# EAGLE board untitled (EAGLE 8.3.1)
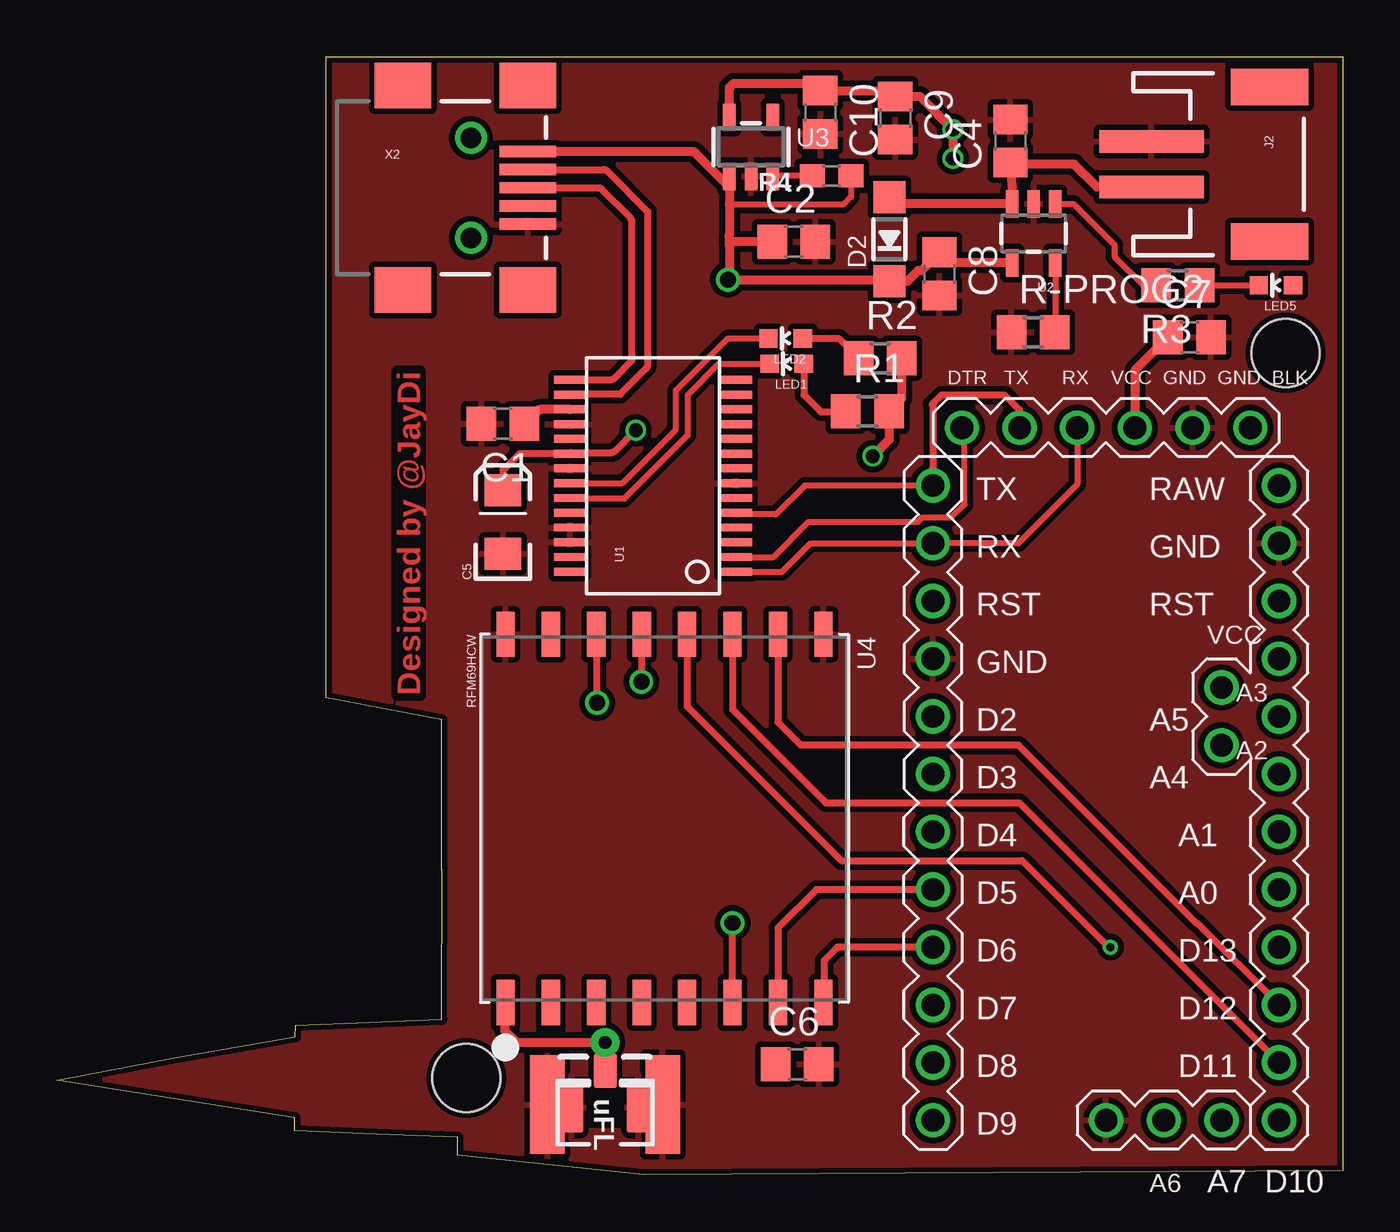
[diagram p0: board, top side]
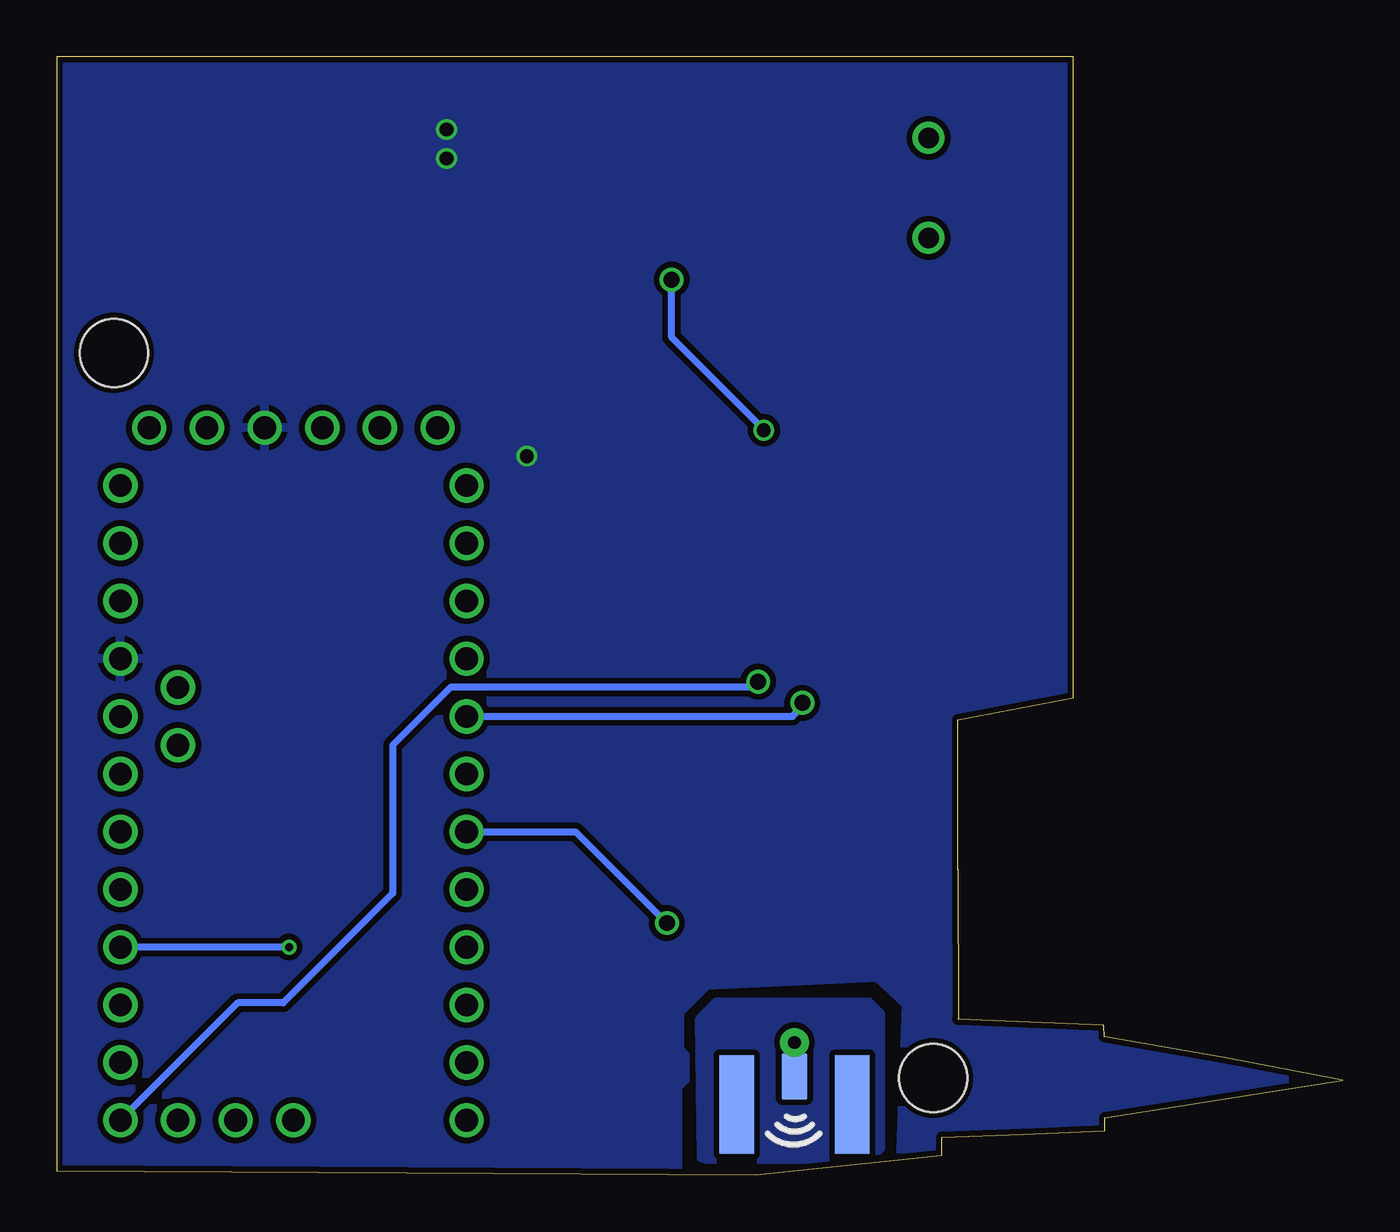
[diagram p1: board, bottom side, seen from below]

Size 56.62 x 49.21 mm. Coordinates in mm from the lower left corner, seen from the top.
Outline: 16.93,13.44 16.93,20.04 11.85,20.99 11.85,49.21 56.62,49.21 56.62,0.18 41.24,0.09 25.86,0 17.64,0.86 17.64,1.66 14.06,1.8 10.48,1.94 10.48,2.5 0,4.16 5.29,5.17 10.5,6.09 10.52,6.55 10.53,6.6 13.78,6.72 16.93,6.84
Outline: 16.93,13.45 16.93,6.84
Copper layers (1*16): Top 0.035mm / dielectric 1.5mm / Bottom 0.035mm
Design rules "dirt_cheap_dirty_boards.v1": minimum track width 5mil, minimum drill 12mil, track to track 5mil, track to pad 5mil, pad to pad 5mil, via to via 5mil, smd to smd 0mil, copper to edge 10mil, drill to drill 10mil, minimum pad ring 10mil, minimum via ring 6mil, stop-mask expansion 2mil, vias tented up to drill 25mil, thermal gap 10mil
Net classes: 0 default: width 0.254 mm, drill 0.6 mm, clearance 0.254 mm; 1 power: width 0.406 mm, drill 0.6 mm, clearance 0.205 mm to class 0, clearance 0.254 mm
Holes 3 mm at 18.03,4.27 54.1,36.18

## Footprints (pad centres in the part's own frame; a part is rotated, then mirrored left to right if it is on the bottom)
C0805 = smd 1.3 x 1.5: 1 -0.95,0; 2 0.95,0
EIA3216 = smd 1.4 x 1.6: A 1.4,0; C -1.4,0
SOD-123 = smd 1.4 x 1.4: A 1.85,0; C -1.85,0
JST-2-SMD = smd 1 x 4.6: 1 -1,-3.7; 2 1,-3.7 | smd 1.6 x 3.4: NC1 -3.4,1.5; NC2 3.4,1.5
SMA_UFL_PAD_TINY = smd 1.524 x 1.016: ANT1 -3.843,0 | drill 0.559 pad 1.27: ANT2 -5.08,0 | smd 2.032 x 1.143 bottom: ANT3 -3.589,0 | smd 2.2 x 1.016: GND1 -2.223,1.47; GND2 -2.223,-1.47 | smd 4.318 x 1.524: GND3 -2.349,-2.54; GND4 -2.349,2.54 | smd 4.318 x 1.524 bottom: GND5 -2.349,2.54; GND6 -2.349,-2.54
LED-0603 = smd 0.8 x 0.8: A 0,-0.75; C 0,0.75
R0805 = smd 1.3 x 1.5: 1 -0.95,0; 2 0.95,0
0603-NO = smd 1.1 x 1: 1 -0.85,0; 2 0.85,0
SSOP28DB = smd 0.348 x 1.397: 1 -4.225,-3.656; 2 -3.575,-3.656; 3 -2.925,-3.656; 4 -2.275,-3.656; 5 -1.625,-3.656; 6 -0.975,-3.656; 7 -0.325,-3.656; 8 0.325,-3.656; 9 0.975,-3.656; 10 1.625,-3.656; 11 2.275,-3.656; 12 2.925,-3.656; 13 3.575,-3.656; 14 4.225,-3.656; 15 4.225,3.656; 16 3.575,3.656; 17 2.925,3.656; 18 2.275,3.656; 19 1.625,3.656; 20 0.975,3.656; 21 0.325,3.656; 22 -0.325,3.656; 23 -0.975,3.656; 24 -1.625,3.656; 25 -2.275,3.656; 26 -2.925,3.656; 27 -3.575,3.656; 28 -4.225,3.656
SOT23-5 = smd 0.55 x 1.2: 1 -0.95,-1.3; 2 0,-1.3; 3 0.95,-1.3; 4 0.95,1.3; 5 -0.95,1.3
RFMHCW_SMT = smd 2 x 0.8: 1P 8.1,-7; 2P 8.1,-5; 3P 8.1,-3; 4P 8.1,-1; 5P 8.1,1; 6P 8.1,3; 7P 8.1,5; 8P 8.1,7; 9P -8.1,7; 10P -8.1,5; 11P -8.1,3; 12P -8.1,1; 13P -8.1,-1; 14P -8.1,-3; 15P -8.1,-5; 16P -8.1,-7
ARDUINO_PRO_MINI = drill 1: A0 11.43,-8.89; A1 11.43,-6.35; A2 11.43,-3.81; A3 11.43,-1.27; A4 8.89,-2.54; A5 8.89,0; A6 6.35,-19.05; A7 8.89,-19.05; BLK 10.16,11.43; D2 -3.81,-1.27; D3 -3.81,-3.81; D4 -3.81,-6.35; D5 -3.81,-8.89; D6 -3.81,-11.43; D7 -3.81,-13.97; D8 -3.81,-16.51; D9 -3.81,-19.05; D10 11.43,-19.05; D11 11.43,-16.51; D12 11.43,-13.97; D13 11.43,-11.43; DTR -2.54,11.43; GND -3.81,1.27; GND@1 11.43,6.35; GND@2 7.62,11.43; GND@3 3.81,-19.05; RAW 11.43,8.89; RST 11.43,3.81; RST@1 -3.81,3.81; RX -3.81,6.35; RX@1 2.54,11.43; TX -3.81,8.89; TX@1 0,11.43; VCC 11.43,1.27; VCC@1 5.08,11.43
USB-MINIB-NOSTOP = smd 2.5 x 0.5: D+ 2.5,0; D- 2.5,0.8; GND 2.5,-1.6; ID 2.5,-0.8; VBUS 2.5,1.6 | smd 2.5 x 2: G1 -3,-4.5; G2 -3,4.5; G3 2.5,4.5; G4 2.5,-4.5 | drill 0.9 pad 0.8: H1 0,2.2 | drill 0.9 pad 0.787: H2 0,-2.2

## Placement (x,y rotation side)
C1  0.1uF  [C0805]  19.65,33.06 180 top
C2  0.1uF  [C0805]  32.44,41.07 0 top
C4  10u  [C0805]  42,45.5 90 top
C5  10uF  [EIA3216]  19.65,28.74 90 top
C6  100n  [C0805]  32.6,4.86 0 top
C7  100n  [C0805]  49.87,36.87 0 top
C8  10µF  [C0805]  38.87,39.66 270 top
C9  1uF  [C0805]  36.92,46.52 270 top
C10  10µF  [C0805]  33.62,46.77 270 top
D2  MBR120  [SOD-123]  36.66,41.18 90 top
J2  [JST-2-SMD]  51.9,44.49 270 top
J$2  ANTENNATINY  [SMA_UFL_PAD_TINY]  24.14,0.75 270 top
LED1  Red  [LED-0603]  32.14,35.7 90 top
LED2  Green  [LED-0603]  32.09,36.81 90 top
LED5  Green  [LED-0603]  53.68,39.15 90 top
R1  1K  [R0805]  35.69,33.61 0 top
R2  1K  [R0805]  36.25,35.95 0 top
R3  330  [R0805]  49.36,39.15 180 top
R4  100k  [0603-NO]  34.12,43.98 180 top
R-PROG2  10k  [R0805]  42.99,37.09 0 top
U1  FT232RLSSOP  [SSOP28DB]  26.25,30.77 90 top
U2  MCP73831  [SOT23-5]  43.01,41.44 180 top
U3  SPX3819-3.3  [SOT23-5]  30.57,45.25 0 top
U4  RFM69HCW  [RFMHCW_SMT]  26.75,15.7 270 top
U$1  [ARDUINO_PRO_MINI]  42.39,21.45 0 top
X2  USB-SMD-NS  [USB-MINIB-NOSTOP]  18.24,43.45 0 top

## Library data of the parts
C1 C2 C4 C6-C10 R1-R3 R-PROG2 = rcl
C5 LED1 LED2 LED5 U1 X2 = SparkFun
D2 R4 U3 U4 = microbuilder
J2 = SparkFun-Connectors; PROD_ID: CONN-08352
J$2 = _c2h
U2 = SparkFun-PowerIC; PROD_ID: IC-09995
U$1 = arduinopromini

## Nets
3.3V [power]: C7.1 C9.1 C10.1 R1.2 R2.2 U3.5 U$1.VCC U$1.VCC@1
5V: C2.1 C5.A C8.1 D2.C R4.1 U1.20 U2.4 U3.1 X2.VBUS
123 [power]: C1.1 U1.17
+3V3: LED5.A
CS: U4.13P U$1.D10
CTS: U1.11
D2: U4.14P U$1.D2
D4: U4.6P U$1.D4
D5: U4.7P U$1.D5
D6: U4.8P U$1.D6
D7: U$1.D7
DTR: U1.2 U$1.DTR
EN: R4.2 U3.3
GND: C1.2 C2.2 C4.2 C5.C C6.2 C7.2 C8.2 C9.2 C10.2 J2.1 J$2.GND1 J$2.GND2 J$2.GND3 J$2.GND4 R-PROG2.1 U1.7 U1.18 U1.21 U1.25 U1.26 U2.2 U3.2 U4.9P U4.16P U$1.GND U$1.GND@1 U$1.GND@2 U$1.GND@3 X2.GND
LOL: R-PROG2.2 U2.5
MISO: U4.10P U$1.D12
MOSI: U4.11P U$1.D11
N$1: LED1.A R1.1
N$2: LED2.A R2.1
N$4: J$2.ANT1 J$2.ANT2 J$2.ANT3
N$5: LED5.C R3.1
N$6: R3.2 U2.1
N$16: U4.2P
POWER: U1.4
RXI: U1.5 U$1.TX U$1.TX@1
RXLED: LED2.C U1.22
SCL: U4.12P U$1.D13
TXLED: LED1.C U1.23
TXO: U1.1 U$1.RX U$1.RX@1
USB_D+: U1.15 X2.D+
USB_D-: U1.16 X2.D-
VBAT: C4.1 D2.A J2.2 U2.3
VCC: U4.5P

## Tracks (layer width: path | path; a pad name or v marks a point on that pad's centre or on a via)
3.3V  (via drill 0.6, 0.6 pad 0.85)
  Top 0.406: U3.5 29.62,47.85 29.81,48.04 33.55,48.04 C10.1 36.66,47.72 C9.1 38,47.47 v39.46,46.01 v39.46,44.74 | 48.67,36.61 C7.1 47.47,35.41 U$1.VCC@1 | R2.2 37.2,34.17 R1.2 36.64,32.35 v35.93,31.63 | v35.93,31.63 35.9,31.61 v35.93,31.63
  pour Bottom: 10.84,49.73 10.84,21.03 14.82,17.05 14.82,10.11 12.53,7.82 3.05,7.82 -0.68,4.1 -0.68,3.59 2.37,0.54 19.47,0.46 19.22,7.49 20.49,8.67 28.02,8.33 29.21,7.15 29.21,5.54 28.96,5.28 28.96,4.18 29.29,3.84 29.29,0.04 29.21,-0.05 56.64,-0.05 56.72,-0.13 56.72,49.31 55.45,50.58 11.69,50.58
5V  (via drill 0.6, 0.7)
  Top 0.254: R4.1 34.97,43.05 34.63,42.71 29.62,42.71 | C5.A 19.73,30.22
  Top 0.305: 29.55,41.31 29.62,41.37 | C5.A 19.65,31.02 20.37,31.74 U1.20 22.63,31.79 24.39,31.79 arc45 24.57,31.86 v25.49,32.78
  Top 0.406: 29.59,43.98 U3.1 29.62,43.48 | 29.62,43.48 29.62,42.71 29.62,41.37 29.62,40.93 | C8.1 | U2.4 39.33,40.14 C8.1 | C8.1 38.09,39.82 37.93,39.82 37.45,39.33 D2.C 36.59,39.41 v29.55,39.41 29.62,39.47 29.62,40.93 | C2.1 29.75,41.07 29.62,40.93 | X2.VBUS 27.95,45.05 arc-45 28.13,44.97 29.62,43.48
  Bottom 0.305: v29.55,39.41 29.55,36.87 25.51,32.82 arc45 v25.49,32.78
123
  Top 0.406: U1.17 21.34,33.69 arc45 21.16,33.62 C1.1
CS  (via drill 0.7 pad 1.05)
  Top 0.305: U4.13P 25.74,23.8 v25.74,21.71
  Bottom 0.305: v25.74,21.71 25.99,21.45 39.28,21.45 41.82,18.91 41.82,12.4 46.65,7.57 48.65,7.57 U$1.D10
D2  (via drill 0.7 pad 1.05)
  Top 0.305: v23.79,20.78 23.79,23.76 U4.14P
  Bottom 0.305: U$1.D2 24.22,20.18 23.79,20.61 v23.79,20.78
D4  (via drill 0.7 pad 1.05)
  Top 0.305: U4.6P v29.75,11.09 29.75,11.17
  Bottom 0.305: U$1.D4 33.77,15.1 v29.75,11.09
D5
  Top 0.305: U$1.D5 33.44,12.56 31.75,10.87 U4.7P
D6
  Top 0.305: U$1.D6 34.37,10.02 33.78,9.43 33.78,7.23 33.95,7.06 33.95,7.4 U4.8P
DTR
  Top 0.254: U1.2 31.56,27.19 33.11,28.74 37.91,28.74 38.11,28.94 39.4,28.94 39.97,29.5 39.97,32.77 U$1.DTR
EN
  Top 0.254: R4.2 31.55,43.98 U3.3
GND
  Top 0.406: J$2.GND2 22.24,3.22 J$2.GND3
  pour Top: 11.77,49.24 11.54,7.38 -0.78,6.23 0.37,-0.09 44.66,-0.37 57.34,-0.22 57.06,49.95 11.69,49.46
  pour Bottom: 28.36,6.89 27.6,7.65 20.83,7.65 20.32,7.15 20.32,1.14 20.83,0.63 28.02,0.63 28.28,0.71
LOL
  Top 0.254: U2.5 43.96,38.41 R-PROG2.2
MISO
  Top 0.305: 31.75,19.92 32.77,18.91 42.34,18.91 50.16,11.1 50.21,11.1 U$1.D12 | 31.75,19.92 31.75,19.93 | U4.10P 31.75,19.92
MOSI
  Top 0.305: U4.11P 29.75,20.49 33.87,16.37 42.39,16.37 U$1.D11
N$1
  Top 0.305: LED1.A 32.89,34.34 33.64,33.59 34.72,33.59 R1.1
N$2
  Top 0.305: LED2.A 34.43,36.81 R2.1
N$4
  Top 0.406: J$2.ANT1 J$2.ANT2 | J$2.ANT2 23.89,5.83 | J$2.ANT2 20.33,5.83 arc-45 20.16,5.9 19.75,6.31 19.75,7.69
  Bottom 0.406: J$2.ANT2 J$2.ANT3
N$5
  Top 0.254: R3.1 LED5.C
N$6
  Top 0.254: U2.1 44.76,42.74 46.57,40.93 46.57,40.42 47.84,39.15 R3.2
RXI
  Top 0.254: U1.5 29.98,29.07 31.66,29.07 32.93,30.34 U$1.TX
  Top 0.305: U$1.TX@1 42.39,33.68 41.74,34.33 38.95,34.33 38.54,33.91 38.58,33.87 U$1.TX
RXLED
  Top 0.254: U1.22 24.91,30.44 27.27,32.8 27.27,34.54 29.54,36.81 LED2.C
SCL  (via drill 0.35)
  Top 0.305: U4.12P 27.75,20.62 34.54,13.83 42.51,13.83 46.31,10.04 46.38,10.04 v46.4,10.03
  Bottom 0.305: v46.4,10.03 U$1.D13
TXLED
  Top 0.254: U1.23 22.63,29.75 24.98,29.75 27.77,32.55 27.77,34.33 29.15,35.7 LED1.C
TXO
  Top 0.254: U1.1 31.93,26.54 33.19,27.8 U$1.RX 42.33,27.8 44.93,30.4 U$1.RX@1
USB_D+
  Top 0.305: U1.15 24.37,34.99 arc45 24.55,35.07 25.31,35.82 25.31,41.97 arc45 25.24,42.15 24.01,43.37 arc45 23.83,43.45 X2.D+ arc45 20.75,43.49
USB_D-
  Top 0.254: U1.16 22.57,34.33
  Top 0.305: U1.16 arc-45 22.61,34.35 24.8,34.35 25.95,35.5 arc45 26.02,35.68 26.02,42.4 24.25,44.17 arc45 24.07,44.25 X2.D-
VBAT
  Top 0.406: 42.02,44.3 42.06,43.45 U2.3 36.96,42.74 D2.A | 42.02,44.3 C4.1 | J2.2 45.79,43.49 44.79,44.49 42.2,44.49 42.02,44.3

## Text on the board
Top: Designed by @JayDi